# Altium PCB LED_Ring_80mm.pcbdoc (part 2 of 3)
Units mm, origin at the board's own origin, x right, y up, seen from the top; angles counter-clockwise.
Board outline 95 x 95 mm, 2 copper layers (Top Layer, Bottom Layer), stack 1.071 mm thick; 20 components, 18 nets, 2525 pads, 18 vias.
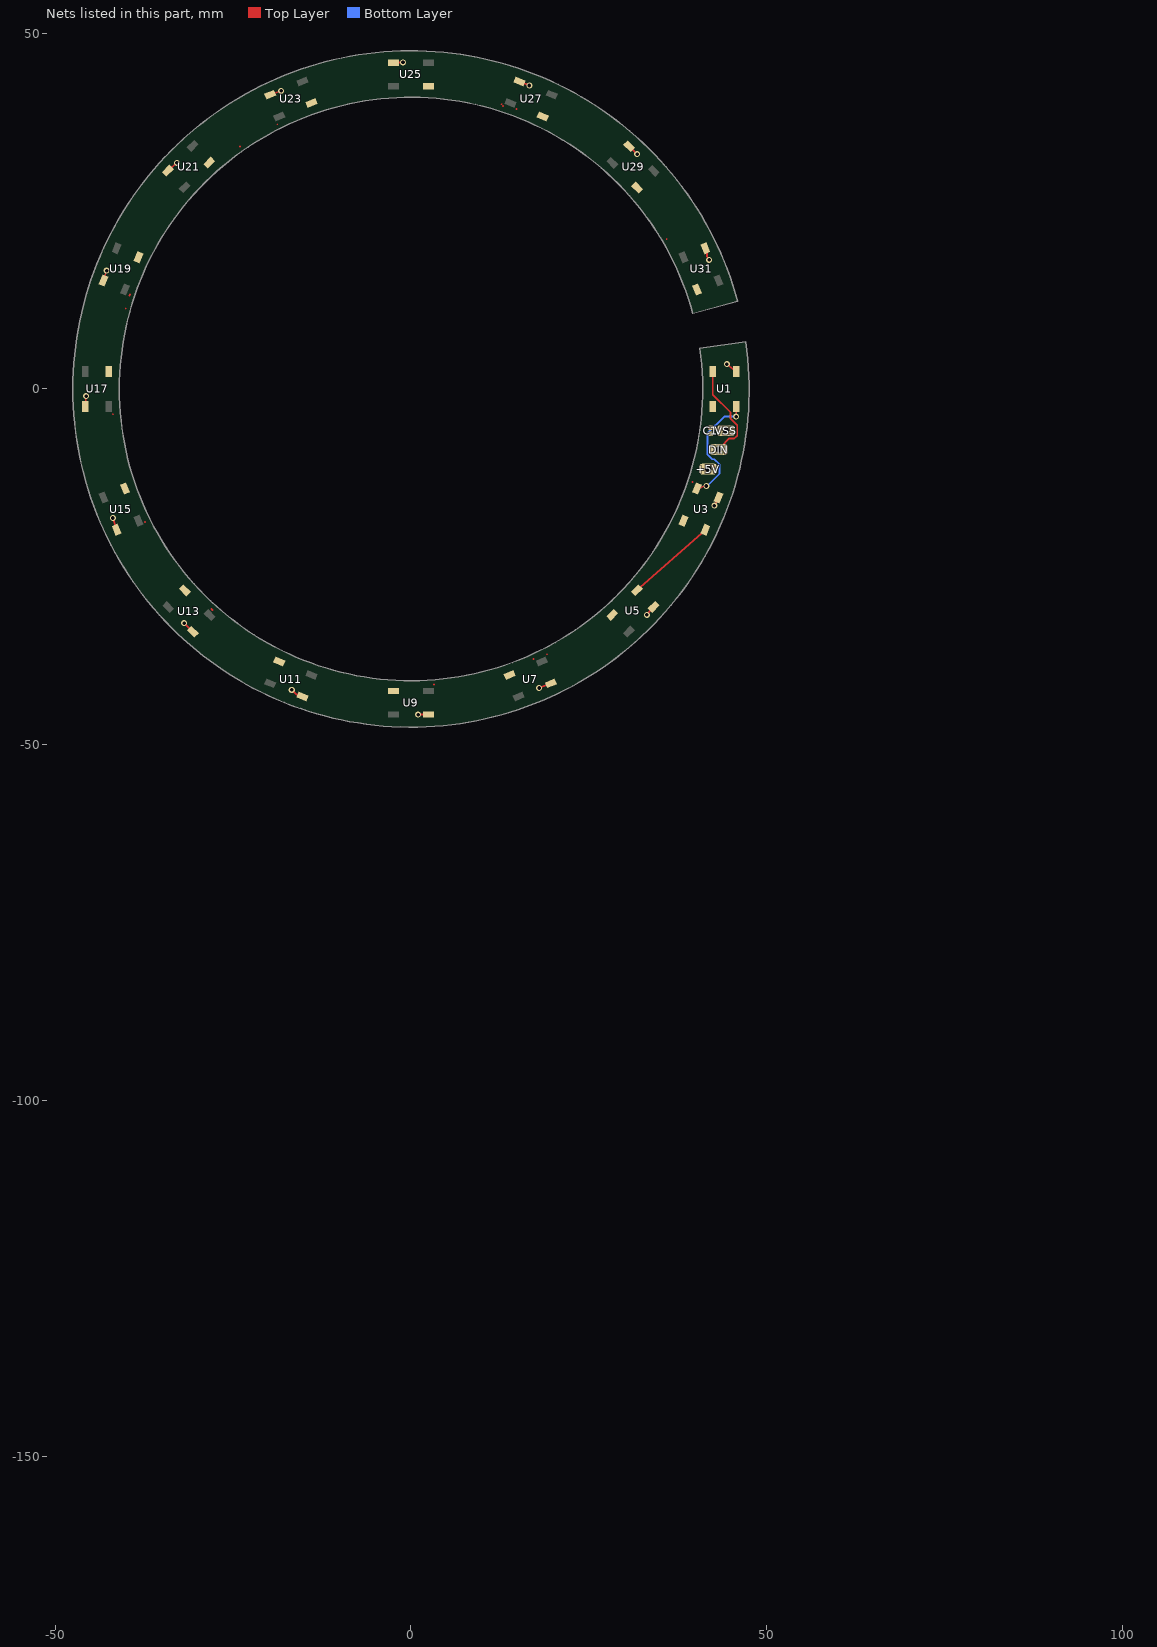
[diagram p2: the nets of this part, all layers, seen from the top]

## Free pads (board coordinates)
  round 0.042 on Mech7: 1(77.389,-166.432) 1(77.389,-166.432) 1(77.401,-166.262) 1(77.401,-166.262) 1(77.413,-166.444) 1(77.413,-166.444) 1(77.423,-166.216) 1(77.423,-166.216) 1(77.446,-166.08) 1(77.446,-166.08) 1(77.48,-166.421) 1(77.48,-166.421) 1(77.503,-165.943) 1(77.503,-165.943) 1(77.515,-165.864) 1(77.515,-165.864) 1(77.56,-165.773) 1(77.56,-165.773) 1(77.571,-166.33) 1(77.571,-166.33) 1(77.571,-165.716) 1(77.571,-165.716) 1(77.583,-166.295) 1(77.583,-166.295) 1(77.605,-166.284) 1(77.605,-166.284) 1(77.617,-166.25) 1(77.617,-166.25) 1(77.65,-166.216) 1(77.65,-166.216) 1(77.65,-165.557) 1(77.65,-165.557) 1(77.662,-166.182) 1(77.662,-166.182) 1(77.685,-165.432) 1(77.685,-165.432) 1(77.697,-166.148) 1(77.697,-166.148) 1(77.719,-165.387) 1(77.719,-165.387) 1(77.73,-165.33) 1(77.73,-165.33) 1(77.742,-166.046) 1(77.742,-166.046) 1(77.764,-166.035) 1(77.764,-166.035) 1(77.764,-165.273) 1(77.764,-165.273) 1(77.776,-166) 1(77.776,-166) 1(77.776,-165.216) 1(77.776,-165.216) 1(77.799,-165.989) 1(77.799,-165.989) 1(77.799,-161.524) 1(77.799,-161.524) 1(77.81,-165.955) 1(77.81,-165.955) 1(77.81,-161.251) 1(77.81,-161.251) 1(77.832,-161.853) 1(77.832,-161.853) 1(77.832,-161.217) 1(77.832,-161.217) 1(77.844,-165.921) 1(77.844,-165.921) 1(77.844,-165.103) 1(77.844,-165.103) 1(77.855,-165.886) 1(77.855,-165.886) 1(77.855,-165.046) 1(77.855,-165.046) 1(77.855,-161.899) 1(77.855,-161.899) 1(77.867,-162.001) 1(77.867,-162.001) 1(77.867,-161.206) 1(77.867,-161.206) 1(77.878,-161.228) 1(77.878,-161.228) 1(77.889,-165.853) 1(77.889,-165.853) 1(77.901,-162.103) 1(77.901,-162.103) 1(77.901,-161.228) 1(77.901,-161.228) 1(77.924,-164.921) 1(77.924,-164.921) 1(77.934,-165.75) 1(77.934,-165.75) 1(77.934,-164.864) 1(77.934,-164.864) 1(77.958,-162.421) 1(77.958,-162.421) 1(77.958,-161.308) 1(77.958,-161.308) 1(77.969,-165.716) 1(77.969,-165.716) 1(77.981,-165.682) 1(77.981,-165.682) 1(77.981,-161.365) 1(77.981,-161.365) 1(77.991,-161.365) 1(77.991,-161.365) 1(78.014,-165.648) 1(78.014,-165.648) 1(78.014,-162.581) 1(78.014,-162.581) 1(78.026,-165.614) 1(78.026,-165.614) 1(78.026,-161.445) 1(78.026,-161.445) 1(78.037,-161.445) 1(78.037,-161.445) 1(78.048,-164.66) 1(78.048,-164.66) 1(78.048,-161.501) 1(78.048,-161.501) 1(78.06,-165.58) 1(78.06,-165.58) 1(78.06,-164.603) 1(78.06,-164.603) 1(78.06,-161.501) 1(78.06,-161.501) 1(78.071,-165.545) 1(78.071,-165.545) 1(78.071,-162.842) 1(78.071,-162.842) 1(78.083,-161.58) 1(78.083,-161.58) 1(78.094,-161.58) 1(78.094,-161.58) 1(78.105,-165.512) 1(78.105,-165.512) 1(78.116,-165.478) 1(78.116,-165.478) 1(78.128,-161.694) 1(78.128,-161.694) 1(78.14,-161.694) 1(78.14,-161.694) 1(78.151,-161.751) 1(78.151,-161.751) 1(78.162,-161.751) 1(78.162,-161.751) 1(78.185,-165.387) 1(78.185,-165.387) 1(78.196,-165.353) 1(78.196,-165.353) 1(78.196,-164.342) 1(78.196,-164.342) 1(78.196,-161.853) 1(78.196,-161.853) 1(78.208,-161.853) 1(78.208,-161.853) 1(78.219,-163.251) 1(78.219,-163.251) 1(78.219,-161.91) 1(78.219,-161.91) 1(78.23,-163.33) 1(78.23,-163.33) 1(78.23,-161.91) 1(78.23,-161.91) 1(78.242,-161.967) 1(78.242,-161.967) 1(78.253,-165.273) 1(78.253,-165.273) 1(78.253,-164.262) 1(78.253,-164.262) 1(78.253,-161.967) 1(78.253,-161.967) 1(78.265,-163.398) 1(78.265,-163.398) 1(78.265,-162.023) 1(78.265,-162.023) 1(78.275,-165.216) 1(78.275,-165.216) 1(78.275,-164.205) 1(78.275,-164.205) 1(78.275,-163.478) 1(78.275,-163.478) 1(78.275,-162.023) 1(78.275,-162.023) 1(78.298,-165.205) 1(78.298,-165.205) 1(78.298,-162.115) 1(78.298,-162.115) 1(78.31,-165.171) 1(78.31,-165.171) 1(78.31,-162.115) 1(78.31,-162.115) 1(78.321,-162.172) 1(78.321,-162.172) 1(78.332,-162.172) 1(78.332,-162.172) 1(78.344,-165.137) 1(78.344,-165.137) 1(78.344,-163.649) 1(78.344,-163.649) 1(78.344,-162.228) 1(78.344,-162.228) 1(78.355,-165.103) 1(78.355,-165.103) 1(78.355,-164.058) 1(78.355,-164.058) 1(78.355,-163.705) 1(78.355,-163.705) 1(78.355,-162.228) 1(78.355,-162.228) 1(78.367,-162.285) 1(78.367,-162.285) 1(78.378,-162.285) 1(78.378,-162.285) 1(78.389,-162.342) 1(78.389,-162.342) 1(78.4,-165.057) 1(78.4,-165.057) 1(78.4,-163.796) 1(78.4,-163.796) 1(78.4,-162.342) 1(78.4,-162.342) 1(78.412,-165.024) 1(78.412,-165.024) 1(78.412,-163.978) 1(78.412,-163.978) 1(78.412,-163.853) 1(78.412,-163.853) 1(78.412,-162.399) 1(78.412,-162.399) 1(78.424,-162.399) 1(78.424,-162.399) 1(78.435,-163.921) 1(78.435,-163.921) 1(78.446,-164.989) 1(78.446,-164.989) 1(78.446,-163.91) 1(78.446,-163.91) 1(78.446,-162.478) 1(78.446,-162.478) 1(78.457,-164.955) 1(78.457,-164.955) 1(78.457,-162.478) 1(78.457,-162.478) 1(78.469,-162.535) 1(78.469,-162.535) 1(78.48,-162.535) 1(78.48,-162.535) 1(78.492,-164.921) 1(78.492,-164.921) 1(78.503,-162.615) 1(78.503,-162.615) 1(78.514,-164.864) 1(78.514,-164.864) 1(78.514,-162.615) 1(78.514,-162.615) 1(78.537,-164.853) 1(78.537,-164.853) 1(78.549,-164.818) 1(78.549,-164.818) 1(78.559,-162.705) 1(78.559,-162.705) 1(78.594,-164.773) 1(78.594,-164.773) 1(78.606,-164.739) 1(78.606,-164.739) 1(78.606,-162.865) 1(78.606,-162.865) 1(78.616,-162.865) 1(78.616,-162.865) 1(78.628,-164.728) 1(78.628,-164.728) 1(78.628,-162.922) 1(78.628,-162.922) 1(78.639,-164.693) 1(78.639,-164.693) 1(78.639,-162.922) 1(78.639,-162.922) 1(78.662,-164.683) 1(78.662,-164.683) 1(78.673,-164.648) 1(78.673,-164.648) 1(78.696,-164.637) 1(78.696,-164.637) 1(78.708,-164.603) 1(78.708,-164.603) 1(78.741,-164.58) 1(78.741,-164.58) 1(78.764,-163.171) 1(78.764,-163.171) 1(78.776,-163.228) 1(78.776,-163.228) 1(78.787,-163.228) 1(78.787,-163.228) 1(78.81,-163.296) 1(78.81,-163.296) 1(78.843,-164.773) 1(78.843,-164.773) 1(78.878,-163.228) 1(78.878,-163.228) 1(78.89,-163.194) 1(78.89,-163.194) 1(78.935,-163.114) 1(78.935,-163.114) 1(78.969,-163.081) 1(78.969,-163.081) 1(78.98,-163.046) 1(78.98,-163.046) 1(79.003,-165.08) 1(79.003,-165.08) 1(79.014,-165.114) 1(79.014,-165.114) 1(79.025,-163.012) 1(79.025,-163.012) 1(79.037,-162.978) 1(79.037,-162.978) 1(79.06,-162.967) 1(79.06,-162.967) 1(79.071,-165.194) 1(79.071,-165.194) 1(79.071,-162.932) 1(79.071,-162.932) 1(79.082,-165.228) 1(79.082,-165.228) 1(79.117,-165.261) 1(79.117,-165.261) 1(79.127,-165.296) 1(79.127,-165.296) 1(79.139,-162.865) 1(79.139,-162.865) 1(79.151,-162.83) 1(79.151,-162.83) 1(79.162,-165.33) 1(79.162,-165.33) 1(79.174,-165.364) 1(79.174,-165.364) 1(79.184,-164.012) 1(79.184,-164.012) 1(79.196,-165.375) 1(79.196,-165.375) 1(79.196,-164.012) 1(79.196,-164.012) 1(79.196,-162.751) 1(79.196,-162.751) 1(79.207,-165.41) 1(79.207,-165.41) 1(79.219,-164.068) 1(79.219,-164.068) 1(79.23,-164.068) 1(79.23,-164.068) 1(79.241,-163.955) 1(79.241,-163.955) 1(79.241,-162.717) 1(79.241,-162.717) 1(79.253,-163.921) 1(79.253,-163.921) 1(79.253,-162.683) 1(79.253,-162.683) 1(79.264,-165.489) 1(79.264,-165.489) 1(79.264,-164.148) 1(79.264,-164.148) 1(79.276,-165.523) 1(79.276,-165.523) 1(79.276,-164.148) 1(79.276,-164.148) 1(79.298,-164.205) 1(79.298,-164.205) 1(79.298,-163.887) 1(79.298,-163.887) 1(79.309,-165.557) 1(79.309,-165.557) 1(79.309,-164.205) 1(79.309,-164.205) 1(79.309,-163.853) 1(79.309,-163.853) 1(79.321,-165.592) 1(79.321,-165.592) 1(79.332,-164.262) 1(79.332,-164.262) 1(79.344,-164.262) 1(79.344,-164.262) 1(79.355,-165.625) 1(79.355,-165.625) 1(79.355,-163.819) 1(79.355,-163.819) 1(79.366,-165.659) 1(79.366,-165.659) 1(79.366,-164.319) 1(79.366,-164.319) 1(79.366,-163.784) 1(79.366,-163.784) 1(79.366,-162.581) 1(79.366,-162.581) 1(79.378,-164.319) 1(79.378,-164.319) 1(79.378,-162.546) 1(79.378,-162.546) 1(79.389,-165.671) 1(79.389,-165.671) 1(79.401,-165.705) 1(79.401,-165.705) 1(79.401,-164.376) 1(79.401,-164.376) 1(79.411,-164.376) 1(79.411,-164.376) 1(79.423,-165.716) 1(79.423,-165.716) 1(79.423,-164.409) 1(79.423,-164.409) 1(79.423,-163.739) 1(79.423,-163.739) 1(79.423,-162.512) 1(79.423,-162.512) 1(79.435,-165.75) 1(79.435,-165.75) 1(79.435,-164.409) 1(79.435,-164.409) 1(79.435,-163.705) 1(79.435,-163.705) 1(79.435,-162.478) 1(79.435,-162.478) 1(79.446,-164.444) 1(79.446,-164.444) 1(79.458,-165.762) 1(79.458,-165.762) 1(79.458,-164.444) 1(79.458,-164.444) 1(79.468,-165.796) 1(79.468,-165.796) 1(79.468,-164.478) 1(79.468,-164.478) 1(79.48,-164.478) 1(79.48,-164.478) 1(79.48,-162.444) 1(79.48,-162.444) 1(79.491,-164.512) 1(79.491,-164.512) 1(79.491,-162.41) 1(79.491,-162.41) 1(79.503,-165.819) 1(79.503,-165.819) 1(79.503,-164.512) 1(79.503,-164.512) 1(79.514,-165.853) 1(79.514,-165.853) 1(79.514,-164.546) 1(79.514,-164.546) 1(79.525,-164.546) 1(79.525,-164.546) 1(79.548,-162.364) 1(79.548,-162.364) 1(79.56,-165.886) 1(79.56,-165.886) 1(79.56,-162.331) 1(79.56,-162.331) 1(79.571,-165.921) 1(79.571,-165.921) 1(79.571,-164.626) 1(79.571,-164.626) 1(79.582,-164.626) 1(79.582,-164.626) 1(79.605,-164.671) 1(79.605,-164.671) 1(79.616,-165.955) 1(79.616,-165.955) 1(79.616,-164.671) 1(79.616,-164.671) 1(79.628,-165.989) 1(79.628,-165.989) 1(79.628,-164.705) 1(79.628,-164.705) 1(79.639,-164.705) 1(79.639,-164.705) 1(79.662,-164.75) 1(79.662,-164.75) 1(79.673,-166.023) 1(79.673,-166.023) 1(79.673,-164.75) 1(79.673,-164.75) 1(79.685,-166.057) 1(79.685,-166.057) 1(79.685,-164.785) 1(79.685,-164.785) 1(79.695,-164.785) 1(79.695,-164.785) 1(79.719,-164.83) 1(79.719,-164.83) 1(79.73,-166.091) 1(79.73,-166.091) 1(79.73,-164.83) 1(79.73,-164.83) 1(79.742,-166.125) 1(79.742,-166.125) 1(79.742,-164.864) 1(79.742,-164.864) 1(79.742,-163.41) 1(79.742,-163.41) 1(79.752,-164.864) 1(79.752,-164.864) 1(79.752,-163.376) 1(79.752,-163.376) 1(79.775,-164.91) 1(79.775,-164.91) 1(79.787,-164.91) 1(79.787,-164.91) 1(79.798,-164.944) 1(79.798,-164.944) 1(79.809,-164.944) 1(79.809,-164.944) 1(79.809,-163.319) 1(79.809,-163.319) 1(79.832,-164.989) 1(79.832,-164.989) 1(79.844,-164.989) 1(79.844,-164.989) 1(79.844,-163.308) 1(79.844,-163.308) 1(79.877,-165.024) 1(79.877,-165.024) 1(79.877,-163.262) 1(79.877,-163.262) 1(79.889,-165.057) 1(79.889,-165.057) 1(79.9,-165.057) 1(79.9,-165.057) 1(79.912,-163.251) 1(79.912,-163.251) 1(79.946,-165.103) 1(79.946,-165.103) 1(79.946,-161.944) 1(79.946,-161.944) 1(79.957,-165.137) 1(79.957,-165.137) 1(79.969,-165.137) 1(79.969,-165.137) 1(79.979,-161.933) 1(79.979,-161.933) 1(80.026,-163.126) 1(80.026,-163.126) 1(80.059,-163.114) 1(80.059,-163.114) 1(80.083,-165.251) 1(80.083,-165.251) 1(80.083,-161.819) 1(80.083,-161.819) 1(80.093,-165.284) 1(80.093,-165.284) 1(80.093,-163.069) 1(80.093,-163.069) 1(80.105,-165.284) 1(80.105,-165.284) 1(80.116,-161.808) 1(80.116,-161.808) 1(80.128,-163.057) 1(80.128,-163.057) 1(80.161,-166.546) 1(80.161,-166.546) 1(80.161,-161.762) 1(80.161,-161.762) 1(80.173,-163.001) 1(80.173,-163.001) 1(80.196,-166.557) 1(80.196,-166.557) 1(80.196,-161.751) 1(80.196,-161.751) 1(80.207,-162.989) 1(80.207,-162.989) 1(80.23,-166.603) 1(80.23,-166.603) 1(80.23,-161.706) 1(80.23,-161.706) 1(80.264,-166.614) 1(80.264,-166.614) 1(80.264,-161.694) 1(80.264,-161.694) 1(80.275,-162.922) 1(80.275,-162.922) 1(80.31,-166.671) 1(80.31,-166.671) 1(80.31,-162.91) 1(80.31,-162.91) 1(80.31,-161.637) 1(80.31,-161.637) 1(80.32,-162.887) 1(80.32,-162.887) 1(80.343,-166.682) 1(80.343,-166.682) 1(80.343,-161.626) 1(80.343,-161.626) 1(80.355,-162.876) 1(80.355,-162.876) 1(80.377,-166.728) 1(80.377,-166.728) 1(80.377,-161.58) 1(80.377,-161.58) 1(80.4,-165.592) 1(80.4,-165.592) 1(80.412,-166.738) 1(80.412,-166.738) 1(80.412,-161.569) 1(80.412,-161.569) 1(80.423,-165.592) 1(80.423,-165.592) 1(80.423,-162.808) 1(80.423,-162.808) 1(80.434,-166.773) 1(80.434,-166.773) 1(80.457,-162.797) 1(80.457,-162.797) 1(80.457,-161.524) 1(80.457,-161.524) 1(80.469,-166.785) 1(80.469,-166.785) 1(80.469,-165.648) 1(80.469,-165.648) 1(80.48,-166.807) 1(80.48,-166.807) 1(80.491,-165.648) 1(80.491,-165.648) 1(80.491,-161.512) 1(80.491,-161.512) 1(80.502,-162.751) 1(80.502,-162.751) 1(80.514,-166.818) 1(80.514,-166.818) 1(80.525,-166.841) 1(80.525,-166.841) 1(80.537,-162.74) 1(80.537,-162.74) 1(80.537,-161.467) 1(80.537,-161.467) 1(80.548,-165.716) 1(80.548,-165.716) 1(80.559,-166.852) 1(80.559,-166.852) 1(80.571,-165.716) 1(80.571,-165.716) 1(80.571,-161.455) 1(80.571,-161.455) 1(80.582,-162.694) 1(80.582,-162.694) 1(80.594,-166.887) 1(80.594,-166.887) 1(80.616,-165.773) 1(80.616,-165.773) 1(80.616,-162.683) 1(80.616,-162.683) 1(80.616,-161.41) 1(80.616,-161.41) 1(80.627,-166.898) 1(80.627,-166.898) 1(80.639,-165.773) 1(80.639,-165.773) 1(80.661,-166.932) 1(80.661,-166.932) 1(80.661,-165.807) 1(80.661,-165.807) 1(80.661,-162.638) 1(80.661,-162.638) 1(80.684,-165.807) 1(80.684,-165.807) 1(80.696,-165.829) 1(80.696,-165.829) 1(80.696,-162.626) 1(80.696,-162.626) 1(80.707,-162.603) 1(80.707,-162.603) 1(80.718,-166.955) 1(80.718,-166.955) 1(80.718,-165.829) 1(80.718,-165.829) 1(80.741,-165.864) 1(80.741,-165.864) 1(80.741,-161.353) 1(80.741,-161.353) 1(80.753,-166.989) 1(80.753,-166.989) 1(80.764,-165.864) 1(80.764,-165.864) 1(80.775,-165.886) 1(80.775,-165.886) 1(80.786,-167) 1(80.786,-167) 1(80.786,-162.569) 1(80.786,-162.569) 1(80.786,-161.308) 1(80.786,-161.308) 1(80.798,-165.886) 1(80.798,-165.886) 1(80.821,-167.034) 1(80.821,-167.034) 1(80.821,-165.921) 1(80.821,-165.921) 1(80.821,-162.535) 1(80.821,-162.535) 1(80.843,-165.921) 1(80.843,-165.921) 1(80.855,-167.045) 1(80.855,-167.045) 1(80.855,-165.943) 1(80.855,-165.943) 1(80.855,-162.524) 1(80.855,-162.524) 1(80.866,-162.501) 1(80.866,-162.501) 1(80.866,-161.274) 1(80.866,-161.274) 1(80.878,-165.943) 1(80.878,-165.943) 1(80.9,-165.978) 1(80.9,-165.978) 1(80.923,-165.978) 1(80.923,-165.978) 1(80.935,-167.102) 1(80.935,-167.102) 1(80.935,-166) 1(80.935,-166) 1(80.945,-162.456) 1(80.945,-162.456) 1(80.957,-166) 1(80.957,-166) 1(80.957,-161.217) 1(80.957,-161.217) 1(80.968,-167.114) 1(80.968,-167.114) 1(80.968,-166.023) 1(80.968,-166.023) 1(80.991,-166.023) 1(80.991,-166.023) 1(81.002,-166.046) 1(81.002,-166.046) 1(81.002,-162.433) 1(81.002,-162.433) 1(81.025,-166.046) 1(81.025,-166.046) 1(81.037,-166.068) 1(81.037,-166.068) 1(81.037,-162.399) 1(81.037,-162.399) 1(81.037,-161.171) 1(81.037,-161.171) 1(81.048,-167.171) 1(81.048,-167.171) 1(81.059,-166.068) 1(81.059,-166.068) 1(81.07,-166.091) 1(81.07,-166.091) 1(81.093,-166.091) 1(81.093,-166.091) 1(81.116,-162.354) 1(81.116,-162.354) 1(81.127,-166.125) 1(81.127,-166.125) 1(81.15,-166.125) 1(81.15,-166.125) 1(81.196,-162.307) 1(81.196,-162.307) 1(81.252,-162.297) 1(81.252,-162.297) 1(81.264,-167.284) 1(81.264,-167.284) 1(81.321,-167.296) 1(81.321,-167.296) 1(81.343,-167.318) 1(81.343,-167.318) 1(81.4,-167.33) 1(81.4,-167.33) 1(81.4,-160.979) 1(81.4,-160.979) 1(81.446,-167.363) 1(81.446,-167.363) 1(81.457,-162.183) 1(81.457,-162.183) 1(81.503,-167.375) 1(81.503,-167.375) 1(81.513,-162.172) 1(81.513,-162.172) 1(81.525,-160.944) 1(81.525,-160.944) 1(81.536,-166.33) 1(81.536,-166.33) 1(81.536,-162.149) 1(81.536,-162.149) 1(81.57,-166.33) 1(81.57,-166.33) 1(81.582,-167.42) 1(81.582,-167.42) 1(81.593,-160.899) 1(81.593,-160.899) 1(81.616,-166.364) 1(81.616,-166.364) 1(81.627,-162.126) 1(81.627,-162.126) 1(81.65,-166.364) 1(81.65,-166.364) 1(81.673,-166.387) 1(81.673,-166.387) 1(81.707,-166.387) 1(81.707,-166.387) 1(81.718,-162.08) 1(81.718,-162.08) 1(81.764,-166.421) 1(81.764,-166.421) 1(81.775,-167.488) 1(81.775,-167.488) 1(81.787,-160.842) 1(81.787,-160.842) 1(81.797,-166.421) 1(81.797,-166.421) 1(81.889,-166.466) 1(81.889,-166.466) 1(81.911,-162.023) 1(81.911,-162.023) 1(81.922,-166.466) 1(81.922,-166.466) 1(81.968,-167.557) 1(81.968,-167.557) 1(81.991,-166.501) 1(81.991,-166.501) 1(81.991,-160.763) 1(81.991,-160.763) 1(82.002,-161.978) 1(82.002,-161.978) 1(82.036,-166.501) 1(82.036,-166.501) 1(82.059,-166.523) 1(82.059,-166.523) 1(82.093,-166.523) 1(82.093,-166.523) 1(82.093,-160.751) 1(82.093,-160.751) 1(82.116,-161.956) 1(82.116,-161.956) 1(82.173,-166.546) 1(82.173,-166.546) 1(82.184,-161.921) 1(82.184,-161.921) 1(82.195,-160.706) 1(82.195,-160.706) 1(82.275,-166.579) 1(82.275,-166.579) 1(82.286,-167.637) 1(82.286,-167.637) 1(82.332,-166.579) 1(82.332,-166.579) 1(82.365,-166.603) 1(82.365,-166.603) 1(82.365,-161.876) 1(82.365,-161.876) 1(82.389,-167.647) 1(82.389,-167.647) 1(82.412,-160.672) 1(82.412,-160.672) 1(82.422,-166.603) 1(82.422,-166.603) 1(82.468,-166.625) 1(82.468,-166.625) 1(82.468,-161.865) 1(82.468,-161.865) 1(82.536,-166.625) 1(82.536,-166.625) 1(82.57,-161.831) 1(82.57,-161.831) 1(82.582,-166.648) 1(82.582,-166.648) 1(82.604,-167.704) 1(82.604,-167.704) 1(82.627,-160.615) 1(82.627,-160.615) 1(82.639,-166.648) 1(82.639,-166.648) 1(82.684,-166.671) 1(82.684,-166.671) 1(82.718,-161.819) 1(82.718,-161.819) 1(82.741,-166.671) 1(82.741,-166.671) 1(82.775,-161.796) 1(82.775,-161.796) 1(82.786,-166.693) 1(82.786,-166.693) 1(82.843,-166.693) 1(82.843,-166.693) 1(82.911,-160.581) 1(82.911,-160.581) 1(82.923,-161.786) 1(82.923,-161.786) 1(82.945,-166.716) 1(82.945,-166.716) 1(82.968,-160.558) 1(82.968,-160.558) 1(82.98,-161.762) 1(82.98,-161.762) 1(83.059,-166.716) 1(83.059,-166.716) 1(83.127,-161.739) 1(83.127,-161.739) 1(83.161,-166.738) 1(83.161,-166.738) 1(83.172,-167.784) 1(83.172,-167.784) 1(83.274,-166.738) 1(83.274,-166.738) 1(83.32,-160.524) 1(83.32,-160.524) 1(83.445,-161.717) 1(83.445,-161.717) 1(83.502,-166.773) 1(83.502,-166.773) 1(83.558,-160.513) 1(83.558,-160.513) 1(83.729,-166.773) 1(83.729,-166.773) 1(83.786,-167.818) 1(83.786,-167.818) 1(83.991,-161.706) 1(83.991,-161.706) 1(84.297,-160.524) 1(84.297,-160.524) 1(84.343,-161.729) 1(84.343,-161.729) 1(84.422,-160.524) 1(84.422,-160.524) 1(84.57,-161.762) 1(84.57,-161.762) 1(84.627,-166.785) 1(84.627,-166.785) 1(84.786,-161.774) 1(84.786,-161.774) 1(84.808,-160.569) 1(84.808,-160.569) 1(84.831,-167.807) 1(84.831,-167.807) 1(84.876,-161.796) 1(84.876,-161.796) 1(84.945,-160.569) 1(84.945,-160.569) 1(85.025,-161.808) 1(85.025,-161.808) 1(85.149,-161.842) 1(85.149,-161.842) 1(85.252,-166.738) 1(85.252,-166.738) 1(85.263,-160.615) 1(85.263,-160.615) 1(85.331,-161.865) 1(85.331,-161.865) 1(85.366,-166.716) 1(85.366,-166.716) 1(85.468,-160.66) 1(85.468,-160.66) 1(85.593,-161.933) 1(85.593,-161.933) 1(85.603,-166.705) 1(85.603,-166.705) 1(85.603,-160.66) 1(85.603,-160.66) 1(85.65,-167.739) 1(85.65,-167.739) 1(85.672,-161.944) 1(85.672,-161.944) 1(85.706,-161.967) 1(85.706,-161.967) 1(85.74,-160.706) 1(85.74,-160.706) 1(85.808,-160.706) 1(85.808,-160.706) 1(85.899,-162.001) 1(85.899,-162.001) 1(85.934,-162.023) 1(85.934,-162.023) 1(86.013,-160.763) 1(86.013,-160.763) 1(86.047,-162.046) 1(86.047,-162.046) 1(86.081,-160.763) 1(86.081,-160.763) 1(86.104,-162.08) 1(86.104,-162.08) 1(86.228,-162.103) 1(86.228,-162.103) 1(86.297,-167.659) 1(86.297,-167.659) 1(86.445,-167.625) 1(86.445,-167.625) 1(86.467,-162.194) 1(86.467,-162.194) 1(86.502,-166.579) 1(86.502,-166.579) 1(86.558,-166.557) 1(86.558,-166.557) 1(86.592,-167.614) 1(86.592,-167.614) 1(86.661,-162.251) 1(86.661,-162.251) 1(86.683,-166.546) 1(86.683,-166.546) 1(86.717,-162.285) 1(86.717,-162.285) 1(86.729,-160.922) 1(86.729,-160.922) 1(86.876,-167.557) 1(86.876,-167.557) 1(86.876,-162.331) 1(86.876,-162.331) 1(86.933,-161.001) 1(86.933,-161.001) 1(86.956,-162.376) 1(86.956,-162.376) 1(86.967,-166.489) 1(86.967,-166.489) 1(86.978,-161.001) 1(86.978,-161.001) 1(87.024,-167.545) 1(87.024,-167.545) 1(87.149,-166.477) 1(87.149,-166.477) 1(87.16,-167.511) 1(87.16,-167.511) 1(87.217,-162.456) 1(87.217,-162.456) 1(87.251,-166.444) 1(87.251,-166.444) 1(87.285,-167.5) 1(87.285,-167.5) 1(87.297,-162.501) 1(87.297,-162.501) 1(87.342,-167.477) 1(87.342,-167.477) 1(87.354,-162.512) 1(87.354,-162.512) 1(87.354,-161.126) 1(87.354,-161.126) 1(87.399,-166.432) 1(87.399,-166.432) 1(87.399,-161.126) 1(87.399,-161.126) 1(87.411,-162.546) 1(87.411,-162.546) 1(87.444,-161.161) 1(87.444,-161.161) 1(87.478,-161.161) 1(87.478,-161.161) 1(87.501,-161.183) 1(87.501,-161.183) 1(87.535,-166.398) 1(87.535,-166.398) 1(87.535,-161.183) 1(87.535,-161.183) 1(87.603,-162.603) 1(87.603,-162.603) 1(87.638,-161.228) 1(87.638,-161.228) 1(87.66,-162.638) 1(87.66,-162.638) 1(87.683,-166.387) 1(87.683,-166.387) 1(87.683,-161.228) 1(87.683,-161.228) 1(87.717,-162.648) 1(87.717,-162.648) 1(87.728,-161.263) 1(87.728,-161.263) 1(87.74,-162.671) 1(87.74,-162.671) 1(87.751,-167.409) 1(87.751,-167.409) 1(87.762,-161.263) 1(87.762,-161.263) 1(87.785,-161.285) 1(87.785,-161.285) 1(87.797,-162.683) 1(87.797,-162.683) 1(87.819,-161.285) 1(87.819,-161.285) 1(87.853,-167.375) 1(87.853,-167.375) 1(87.922,-161.331) 1(87.922,-161.331) 1(87.932,-166.341) 1(87.932,-166.341) 1(87.944,-162.762) 1(87.944,-162.762) 1(87.956,-167.363) 1(87.956,-167.363) 1(87.967,-161.331) 1(87.967,-161.331) 1(87.979,-166.319) 1(87.979,-166.319) 1(88.012,-161.365) 1(88.012,-161.365) 1(88.035,-162.785) 1(88.035,-162.785) 1(88.046,-161.365) 1(88.046,-161.365) 1(88.058,-167.33) 1(88.058,-167.33) 1(88.069,-161.388) 1(88.069,-161.388) 1(88.103,-161.388) 1(88.103,-161.388) 1(88.126,-166.307) 1(88.126,-166.307) 1(88.126,-162.842) 1(88.126,-162.842) 1(88.126,-161.41) 1(88.126,-161.41) 1(88.16,-167.318) 1(88.16,-167.318) 1(88.16,-161.41) 1(88.16,-161.41) 1(88.183,-162.853) 1(88.183,-162.853) 1(88.183,-161.433) 1(88.183,-161.433) 1(88.216,-161.433) 1(88.216,-161.433) 1(88.263,-167.284) 1(88.263,-167.284) 1(88.285,-166.262) 1(88.285,-166.262) 1(88.296,-162.922) 1(88.296,-162.922) 1(88.296,-161.478) 1(88.296,-161.478) 1(88.33,-161.478) 1(88.33,-161.478) 1(88.353,-162.932) 1(88.353,-162.932) 1(88.353,-161.501) 1(88.353,-161.501) 1(88.365,-167.273) 1(88.365,-167.273) 1(88.387,-161.501) 1(88.387,-161.501) 1(88.41,-162.967) 1(88.41,-162.967) 1(88.433,-166.25) 1(88.433,-166.25) 1(88.467,-167.239) 1(88.467,-167.239) 1(88.467,-162.978) 1(88.467,-162.978) 1(88.501,-161.569) 1(88.501,-161.569) 1(88.535,-161.569) 1(88.535,-161.569) 1(88.557,-163.035) 1(88.557,-163.035) 1(88.557,-161.592) 1(88.557,-161.592) 1(88.569,-167.227) 1(88.569,-167.227) 1(88.592,-166.205) 1(88.592,-166.205) 1(88.592,-161.592) 1(88.592,-161.592) 1(88.614,-163.046) 1(88.614,-163.046) 1(88.614,-161.615) 1(88.614,-161.615) 1(88.649,-161.615) 1(88.649,-161.615) 1(88.728,-167.182) 1(88.728,-167.182) 1(88.751,-166.182) 1(88.751,-166.182) 1(88.876,-163.183) 1(88.876,-163.183) 1(88.888,-167.159) 1(88.888,-167.159) 1(88.898,-166.137) 1(88.898,-166.137) 1(88.933,-161.762) 1(88.933,-161.762) 1(88.967,-161.762) 1(88.967,-161.762) 1(89.046,-163.273) 1(89.046,-163.273) 1(89.103,-163.285) 1(89.103,-163.285) 1(89.115,-166.113) 1(89.115,-166.113) 1(89.205,-167.069) 1(89.205,-167.069) 1(89.217,-161.899) 1(89.217,-161.899) 1(89.251,-161.899) 1(89.251,-161.899) 1(89.296,-166.068) 1(89.296,-166.068) 1(89.364,-161.967) 1(89.364,-161.967) 1(89.376,-166.035) 1(89.376,-166.035) 1(89.399,-161.967) 1(89.399,-161.967) 1(89.409,-161.99) 1(89.409,-161.99) 1(89.433,-161.99) 1(89.433,-161.99) 1(89.444,-163.467) 1(89.444,-163.467) 1(89.466,-162.023) 1(89.466,-162.023) 1(89.489,-162.023) 1(89.489,-162.023) 1(89.569,-162.08) 1(89.569,-162.08) 1(89.591,-162.08) 1(89.591,-162.08) 1(89.693,-165.978) 1(89.693,-165.978) 1(89.796,-162.194) 1(89.796,-162.194) 1(89.83,-162.194) 1(89.83,-162.194) 1(89.842,-162.217) 1(89.842,-162.217) 1(89.864,-162.217) 1(89.864,-162.217) 1(89.899,-162.251) 1(89.899,-162.251) 1(89.91,-163.694) 1(89.91,-163.694) 1(89.921,-162.251) 1(89.921,-162.251) 1(89.944,-165.921) 1(89.944,-165.921) 1(89.944,-163.728) 1(89.944,-163.728) 1(89.978,-163.739) 1(89.978,-163.739) 1(90.001,-162.307) 1(90.001,-162.307) 1(90.024,-165.886) 1(90.024,-165.886) 1(90.024,-162.307) 1(90.024,-162.307) 1(90.057,-163.796) 1(90.057,-163.796) 1(90.126,-162.364) 1(90.126,-162.364) 1(90.137,-163.841) 1(90.137,-163.841) 1(90.159,-162.399) 1(90.159,-162.399) 1(90.183,-162.399) 1(90.183,-162.399) 1(90.216,-162.433) 1(90.216,-162.433) 1(90.239,-166.807) 1(90.239,-166.807) 1(90.239,-162.433) 1(90.239,-162.433) 1(90.273,-162.467) 1(90.273,-162.467) 1(90.296,-162.467) 1(90.296,-162.467) 1(90.318,-166.795) 1(90.318,-166.795) 1(90.33,-162.501) 1(90.33,-162.501) 1(90.353,-165.829) 1(90.353,-165.829) 1(90.353,-162.501) 1(90.353,-162.501) 1(90.375,-163.966) 1(90.375,-163.966) 1(90.398,-166.761) 1(90.398,-166.761) 1(90.444,-162.558) 1(90.444,-162.558) 1(90.455,-164.012) 1(90.455,-164.012) 1(90.478,-166.75) 1(90.478,-166.75) 1(90.523,-165.773) 1(90.523,-165.773) 1(90.523,-162.615) 1(90.523,-162.615) 1(90.535,-164.058) 1(90.535,-164.058) 1(90.546,-162.615) 1(90.546,-162.615) 1(90.557,-166.716) 1(90.557,-166.716) 1(90.557,-162.638) 1(90.557,-162.638) 1(90.58,-162.638) 1(90.58,-162.638) 1(90.614,-164.103) 1(90.614,-164.103) 1(90.614,-162.671) 1(90.614,-162.671) 1(90.637,-166.705) 1(90.637,-166.705) 1(90.637,-162.671) 1(90.637,-162.671) 1(90.694,-165.739) 1(90.694,-165.739) 1(90.694,-164.148) 1(90.694,-164.148) 1(90.716,-166.671) 1(90.716,-166.671) 1(90.728,-162.728) 1(90.728,-162.728) 1(90.773,-164.194) 1(90.773,-164.194) 1(90.796,-166.659) 1(90.796,-166.659) 1(90.807,-162.785) 1(90.807,-162.785) 1(90.83,-162.785) 1(90.83,-162.785) 1(90.841,-162.808) 1(90.841,-162.808) 1(90.853,-164.239) 1(90.853,-164.239) 1(90.864,-162.808) 1(90.864,-162.808) 1(90.876,-166.625) 1(90.876,-166.625) 1(90.876,-162.83) 1(90.876,-162.83) 1(90.898,-162.83) 1(90.898,-162.83) 1(90.91,-164.262) 1(90.91,-164.262) 1(90.91,-162.853) 1(90.91,-162.853) 1(90.933,-165.682) 1(90.933,-165.682) 1(90.933,-162.853) 1(90.933,-162.853) 1(90.943,-162.876) 1(90.943,-162.876) 1(90.955,-166.614) 1(90.955,-166.614) 1(90.966,-162.876) 1(90.966,-162.876) 1(90.978,-162.899) 1(90.978,-162.899) 1(90.989,-164.319) 1(90.989,-164.319) 1(91,-162.899) 1(91,-162.899) 1(91.012,-165.648) 1(91.012,-165.648) 1(91.012,-162.922) 1(91.012,-162.922) 1(91.023,-164.33) 1(91.023,-164.33) 1(91.035,-166.579) 1(91.035,-166.579) 1(91.035,-162.922) 1(91.035,-162.922) 1(91.068,-162.955) 1(91.068,-162.955) 1(91.092,-162.955) 1(91.092,-162.955) 1(91.114,-166.568) 1(91.114,-166.568) 1(91.114,-165.637) 1(91.114,-165.637) 1(91.114,-164.399) 1(91.114,-164.399) 1(91.137,-163.001) 1(91.137,-163.001) 1(91.16,-163.001) 1(91.16,-163.001) 1(91.182,-163.035) 1(91.182,-163.035) 1(91.194,-165.602) 1(91.194,-165.602) 1(91.194,-164.444) 1(91.194,-164.444) 1(91.205,-163.035) 1(91.205,-163.035) 1(91.227,-163.069) 1(91.227,-163.069) 1(91.239,-166.523) 1(91.239,-166.523) 1(91.25,-164.466) 1(91.25,-164.466) 1(91.25,-163.069) 1(91.25,-163.069) 1(91.262,-163.092) 1(91.262,-163.092) 1(91.284,-163.092) 1(91.284,-163.092) 1(91.296,-163.114) 1(91.296,-163.114) 1(91.319,-163.114) 1(91.319,-163.114) 1(91.33,-164.523) 1(91.33,-164.523) 1(91.352,-165.58) 1(91.352,-165.58) 1(91.352,-163.149) 1(91.352,-163.149) 1(91.364,-166.501) 1(91.364,-166.501) 1(91.376,-163.149) 1(91.376,-163.149) 1(91.409,-164.558) 1(91.409,-164.558) 1(91.421,-163.194) 1(91.421,-163.194) 1(91.444,-166.466) 1(91.444,-166.466) 1(91.444,-164.591) 1(91.444,-164.591) 1(91.444,-163.194) 1(91.444,-163.194) 1(91.466,-163.228) 1(91.466,-163.228) 1(91.478,-165.535) 1(91.478,-165.535) 1(91.478,-164.603) 1(91.478,-164.603) 1(91.489,-163.228) 1(91.489,-163.228) 1(91.511,-164.637) 1(91.511,-164.637) 1(91.511,-163.262) 1(91.511,-163.262) 1(91.523,-166.454) 1(91.523,-166.454) 1(91.534,-163.262) 1(91.534,-163.262) 1(91.546,-164.648) 1(91.546,-164.648) 1(91.546,-163.285) 1(91.546,-163.285) 1(91.568,-163.285) 1(91.568,-163.285) 1(91.58,-164.683) 1(91.58,-164.683) 1(91.58,-163.308) 1(91.58,-163.308) 1(91.603,-166.421) 1(91.603,-166.421) 1(91.603,-165.512) 1(91.603,-165.512) 1(91.603,-163.308) 1(91.603,-163.308) 1(91.614,-164.693) 1(91.614,-164.693) 1(91.636,-163.341) 1(91.636,-163.341) 1(91.648,-164.728) 1(91.648,-164.728) 1(91.66,-163.341) 1(91.66,-163.341) 1(91.682,-166.409) 1(91.682,-166.409) 1(91.682,-165.478) 1(91.682,-165.478) 1(91.682,-164.739) 1(91.682,-164.739) 1(91.705,-163.387) 1(91.705,-163.387) 1(91.728,-163.387) 1(91.728,-163.387) 1(91.75,-163.421) 1(91.75,-163.421) 1(91.762,-166.375) 1(91.762,-166.375) 1(91.773,-164.807) 1(91.773,-164.807) 1(91.773,-163.421) 1(91.773,-163.421) 1(91.795,-163.455) 1(91.795,-163.455) 1(91.807,-164.818) 1(91.807,-164.818) 1(91.818,-163.455) 1(91.818,-163.455) 1(91.83,-163.478) 1(91.83,-163.478) 1(91.842,-166.364) 1(91.842,-166.364) 1(91.852,-165.443) 1(91.852,-165.443) 1(91.852,-163.478) 1(91.852,-163.478) 1(91.864,-163.5) 1(91.864,-163.5) 1(91.887,-164.875) 1(91.887,-164.875) 1(91.887,-163.5) 1(91.887,-163.5) 1(91.898,-163.523) 1(91.898,-163.523) 1(91.92,-166.33) 1(91.92,-166.33) 1(91.92,-164.887) 1(91.92,-164.887) 1(91.92,-163.523) 1(91.92,-163.523) 1(91.932,-163.547) 1(91.932,-163.547) 1(91.955,-163.547) 1(91.955,-163.547) 1(91.977,-163.58) 1(91.977,-163.58) 1(92,-166.319) 1(92,-166.319) 1(92,-164.944) 1(92,-164.944) 1(92,-163.58) 1(92,-163.58) 1(92.023,-165.387) 1(92.023,-165.387) 1(92.023,-163.614) 1(92.023,-163.614) 1(92.034,-164.955) 1(92.034,-164.955) 1(92.046,-163.614) 1(92.046,-163.614) 1(92.069,-164.989) 1(92.069,-164.989) 1(92.069,-163.649) 1(92.069,-163.649) 1(92.079,-166.284) 1(92.079,-166.284) 1(92.091,-163.649) 1(92.091,-163.649) 1(92.102,-165) 1(92.102,-165) 1(92.114,-163.682) 1(92.114,-163.682) 1(92.136,-165.034) 1(92.136,-165.034) 1(92.136,-163.682) 1(92.136,-163.682) 1(92.148,-165.364) 1(92.148,-165.364) 1(92.148,-163.705) 1(92.148,-163.705) 1(92.159,-166.273) 1(92.159,-166.273) 1(92.171,-165.046) 1(92.171,-165.046) 1(92.171,-163.705) 1(92.171,-163.705) 1(92.182,-163.728) 1(92.182,-163.728) 1(92.205,-165.08) 1(92.205,-165.08) 1(92.205,-163.728) 1(92.205,-163.728) 1(92.216,-163.751) 1(92.216,-163.751) 1(92.228,-166.239) 1(92.228,-166.239) 1(92.239,-165.091) 1(92.239,-165.091) 1(92.239,-163.751) 1(92.239,-163.751) 1(92.261,-163.784) 1(92.261,-163.784) 1(92.273,-165.318) 1(92.273,-165.318) 1(92.273,-165.126) 1(92.273,-165.126) 1(92.284,-163.784) 1(92.284,-163.784) 1(92.307,-166.227) 1(92.307,-166.227) 1(92.307,-165.137) 1(92.307,-165.137) 1(92.307,-163.819) 1(92.307,-163.819) 1(92.33,-163.819) 1(92.33,-163.819) 1(92.341,-165.171) 1(92.341,-165.171) 1(92.353,-165.308) 1(92.353,-165.308) 1(92.353,-163.853) 1(92.353,-163.853) 1(92.375,-163.853) 1(92.375,-163.853) 1(92.398,-163.887) 1(92.398,-163.887) 1(92.41,-166.182) 1(92.41,-166.182) 1(92.42,-163.887) 1(92.42,-163.887) 1(92.432,-165.228) 1(92.432,-165.228) 1(92.443,-163.921) 1(92.443,-163.921) 1(92.466,-165.239) 1(92.466,-165.239) 1(92.466,-163.921) 1(92.466,-163.921) 1(92.477,-165.273) 1(92.477,-165.273) 1(92.489,-166.17) 1(92.489,-166.17) 1(92.489,-163.955) 1(92.489,-163.955) 1(92.512,-163.955) 1(92.512,-163.955) 1(92.534,-163.989) 1(92.534,-163.989) 1(92.557,-163.989) 1(92.557,-163.989) 1(92.58,-164.023) 1(92.58,-164.023) 1(92.602,-164.023) 1(92.602,-164.023) 1(92.625,-164.058) 1(92.625,-164.058) 1(92.647,-164.058) 1(92.647,-164.058) 1(92.694,-164.115) 1(92.694,-164.115) 1(92.716,-164.115) 1(92.716,-164.115) 1(92.761,-164.171) 1(92.761,-164.171) 1(92.784,-164.171) 1(92.784,-164.171) 1(92.807,-166.057) 1(92.807,-166.057) 1(92.807,-164.205) 1(92.807,-164.205) 1(92.829,-164.205) 1(92.829,-164.205) 1(92.852,-164.239) 1(92.852,-164.239) 1(92.875,-164.239) 1(92.875,-164.239) 1(92.886,-166.046) 1(92.886,-166.046) 1(92.898,-164.273) 1(92.898,-164.273) 1(92.921,-164.273) 1(92.921,-164.273) 1(92.943,-164.307) 1(92.943,-164.307) 1(92.966,-166.011) 1(92.966,-166.011) 1(92.966,-164.307) 1(92.966,-164.307) 1(92.988,-164.342) 1(92.988,-164.342) 1(93.011,-164.342) 1(93.011,-164.342) 1(93.034,-164.376) 1(93.034,-164.376) 1(93.045,-166) 1(93.045,-166) 1(93.057,-164.376) 1(93.057,-164.376) 1(93.102,-164.432) 1(93.102,-164.432) 1(93.125,-164.432) 1(93.125,-164.432) 1(93.159,-164.478) 1(93.159,-164.478) 1(93.182,-164.478) 1(93.182,-164.478) 1(93.227,-164.534) 1(93.227,-164.534) 1(93.25,-164.534) 1(93.25,-164.534) 1(93.295,-164.591) 1(93.295,-164.591) 1(93.318,-164.591) 1(93.318,-164.591) 1(93.341,-164.626) 1(93.341,-164.626) 1(93.364,-164.626) 1(93.364,-164.626) 1(93.386,-165.876) 1(93.386,-165.876) 1(93.386,-164.66) 1(93.386,-164.66) 1(93.409,-164.66) 1(93.409,-164.66) 1(93.421,-165.886) 1(93.421,-165.886) 1(93.432,-164.693) 1(93.432,-164.693) 1(93.454,-165.898) 1(93.454,-165.898) 1(93.454,-164.693) 1(93.454,-164.693) 1(93.5,-165.943) 1(93.5,-165.943) 1(93.534,-165.955) 1(93.534,-165.955) 1(93.546,-164.796) 1(93.546,-164.796) 1(93.568,-165.989) 1(93.568,-165.989) 1(93.568,-164.796) 1(93.568,-164.796) 1(93.579,-164.818) 1(93.579,-164.818) 1(93.603,-166) 1(93.603,-166) 1(93.603,-164.818) 1(93.603,-164.818) 1(93.636,-166.035) 1(93.636,-166.035) 1(93.648,-164.875) 1(93.648,-164.875) 1(93.67,-166.046) 1(93.67,-166.046) 1(93.67,-164.875) 1(93.67,-164.875) 1(93.693,-164.91) 1(93.693,-164.91) 1(93.705,-166.08) 1(93.705,-166.08) 1(93.716,-164.91) 1(93.716,-164.91) 1(93.727,-164.932) 1(93.727,-164.932) 1(93.738,-166.091) 1(93.738,-166.091) 1(93.773,-166.125) 1(93.773,-166.125) 1(93.807,-166.137) 1(93.807,-166.137) 1(93.852,-166.182) 1(93.852,-166.182) 1(93.887,-166.193) 1(93.887,-166.193) 1(93.909,-164.887) 1(93.909,-164.887) 1(93.92,-166.227) 1(93.92,-166.227) 1(93.954,-166.239) 1(93.954,-166.239) 1(93.989,-164.853) 1(93.989,-164.853) 1(94,-166.284) 1(94,-166.284) 1(94.034,-166.295) 1(94.034,-166.295) 1(94.068,-166.33) 1(94.068,-166.33) 1(94.068,-164.842) 1(94.068,-164.842) 1(94.102,-166.341) 1(94.102,-166.341) 1(94.114,-166.364) 1(94.114,-166.364) 1(94.148,-166.375) 1(94.148,-166.375) 1(94.148,-164.807) 1(94.148,-164.807) 1(94.181,-166.409) 1(94.181,-166.409) 1(94.216,-166.421) 1(94.216,-166.421) 1(94.227,-164.796) 1(94.227,-164.796) 1(94.261,-166.466) 1(94.261,-166.466) 1(94.306,-164.762) 1(94.306,-164.762) 1(94.352,-166.523) 1(94.352,-166.523) 1(94.386,-166.534) 1(94.386,-166.534) 1(94.386,-164.75) 1(94.386,-164.75) 1(94.398,-166.557) 1(94.398,-166.557) 1(94.432,-166.568) 1(94.432,-166.568) 1(94.443,-166.591) 1(94.443,-166.591) 1(94.443,-165.535) 1(94.443,-165.535) 1(94.455,-165.557) 1(94.455,-165.557) 1(94.465,-164.716) 1(94.465,-164.716) 1(94.477,-166.603) 1(94.477,-166.603) 1(94.477,-165.557) 1(94.477,-165.557) 1(94.488,-166.625) 1(94.488,-166.625) 1(94.522,-166.636) 1(94.522,-166.636) 1(94.534,-166.659) 1(94.534,-166.659) 1(94.545,-164.705) 1(94.545,-164.705) 1(94.568,-166.671) 1(94.568,-166.671) 1(94.579,-166.693) 1(94.579,-166.693) 1(94.579,-165.671) 1(94.579,-165.671) 1(94.602,-165.671) 1(94.602,-165.671) 1(94.614,-166.705) 1(94.614,-166.705) 1(94.625,-166.728) 1(94.625,-166.728) 1(94.647,-165.727) 1(94.647,-165.727) 1(94.659,-166.738) 1(94.659,-166.738) 1(94.659,-164.66) 1(94.659,-164.66) 1(94.67,-165.727) 1(94.67,-165.727) 1(94.704,-166.785) 1(94.704,-166.785) 1(94.739,-166.795) 1(94.739,-166.795) 1(94.739,-165.807) 1(94.739,-165.807) 1(94.739,-164.648) 1(94.739,-164.648) 1(94.761,-165.807) 1(94.761,-165.807) 1(94.784,-166.841) 1(94.784,-166.841) 1(94.818,-166.852) 1(94.818,-166.852) 1(94.818,-164.614) 1(94.818,-164.614) 1(94.829,-166.875) 1(94.829,-166.875) 1(94.841,-165.898) 1(94.841,-165.898) 1(94.863,-166.887) 1(94.863,-166.887) 1(94.863,-165.898) 1(94.863,-165.898) 1(94.898,-166.92) 1(94.898,-166.92) 1(94.898,-165.375) 1(94.898,-165.375) 1(94.898,-164.603) 1(94.898,-164.603) 1(94.931,-166.932) 1(94.931,-166.932) 1(94.931,-165.978) 1(94.931,-165.978) 1(94.931,-164.58) 1(94.931,-164.58) 1(94.954,-165.978) 1(94.954,-165.978) 1(94.977,-166.977) 1(94.977,-166.977) 1(95.011,-166.989) 1(95.011,-166.989) 1(95.056,-167.034) 1(95.056,-167.034) 1(95.056,-164.558) 1(95.056,-164.558) 1(95.068,-166.103) 1(95.068,-166.103) 1(95.09,-167.045) 1(95.09,-167.045) 1(95.09,-166.103) 1(95.09,-166.103) 1(95.102,-167.069) 1(95.102,-167.069) 1(95.125,-166.148) 1(95.125,-166.148) 1(95.136,-167.079) 1(95.136,-167.079) 1(95.136,-164.523) 1(95.136,-164.523) 1(95.147,-166.148) 1(95.147,-166.148) 1(95.17,-167.114) 1(95.17,-167.114) 1(95.193,-165.273) 1(95.193,-165.273) 1(95.204,-167.125) 1(95.204,-167.125) 1(95.215,-167.148) 1(95.215,-167.148) 1(95.215,-166.227) 1(95.215,-166.227) 1(95.215,-164.512) 1(95.215,-164.512) 1(95.238,-166.227) 1(95.238,-166.227) 1(95.25,-167.159) 1(95.25,-167.159) 1(95.25,-166.262) 1(95.25,-166.262) 1(95.261,-166.262) 1(95.261,-166.262) 1(95.284,-167.193) 1(95.284,-167.193) 1(95.295,-164.478) 1(95.295,-164.478) 1(95.317,-167.204) 1(95.317,-167.204) 1(95.317,-166.33) 1(95.317,-166.33) 1(95.34,-166.33) 1(95.34,-166.33) 1(95.352,-165.228) 1(95.352,-165.228) 1(95.363,-167.25) 1(95.363,-167.25) 1(95.374,-164.466) 1(95.374,-164.466) 1(95.397,-167.261) 1(95.397,-167.261) 1(95.431,-167.296) 1(95.431,-167.296) 1(95.454,-164.432) 1(95.454,-164.432) 1(95.466,-167.306) 1(95.466,-167.306) 1(95.477,-167.33) 1(95.477,-167.33) 1(95.477,-165.171) 1(95.477,-165.171) 1(95.511,-167.341) 1(95.511,-167.341) 1(95.511,-166.511) 1(95.511,-166.511) 1(95.534,-166.511) 1(95.534,-166.511) 1(95.534,-164.421) 1(95.534,-164.421) 1(95.556,-167.386) 1(95.556,-167.386) 1(95.591,-167.398) 1(95.591,-167.398) 1(95.601,-167.42) 1(95.601,-167.42) 1(95.613,-164.387) 1(95.613,-164.387) 1(95.624,-166.614) 1(95.624,-166.614) 1(95.636,-167.432) 1(95.636,-167.432) 1(95.636,-165.126) 1(95.636,-165.126) 1(95.648,-166.614) 1(95.648,-166.614) 1(95.681,-167.477) 1(95.681,-167.477) 1(95.693,-164.376) 1(95.693,-164.376) 1(95.715,-167.488) 1(95.715,-167.488) 1(95.727,-164.352) 1(95.727,-164.352) 1(95.738,-167.523) 1(95.738,-167.523) 1(95.761,-166.738) 1(95.761,-166.738) 1(95.761,-165.069) 1(95.761,-165.069) 1(95.772,-167.534) 1(95.772,-167.534) 1(95.783,-167.557) 1(95.783,-167.557) 1(95.783,-166.738) 1(95.783,-166.738) 1(95.807,-164.342) 1(95.807,-164.342) 1(95.818,-167.568) 1(95.818,-167.568) 1(95.829,-167.59) 1(95.829,-167.59) 1(95.863,-167.602) 1(95.863,-167.602) 1(95.875,-167.625) 1(95.875,-167.625) 1(95.885,-166.852) 1(95.885,-166.852) 1(95.908,-167.637) 1(95.908,-167.637) 1(95.908,-166.852) 1(95.908,-166.852) 1(95.92,-167.659) 1(95.92,-167.659) 1(95.92,-165.024) 1(95.92,-165.024) 1(95.92,-164.296) 1(95.92,-164.296) 1(95.954,-167.67) 1(95.954,-167.67) 1(95.999,-167.716) 1(95.999,-167.716) 1(95.999,-164.285) 1(95.999,-164.285) 1(96.034,-167.727) 1(96.034,-167.727) 1(96.045,-164.967) 1(96.045,-164.967) 1(96.056,-167.012) 1(96.056,-167.012) 1(96.079,-167.772) 1(96.079,-167.772) 1(96.079,-167.012) 1(96.079,-167.012) 1(96.113,-167.784) 1(96.113,-167.784) 1(96.113,-164.239) 1(96.113,-164.239) 1(96.159,-167.829) 1(96.159,-167.829) 1(96.181,-167.125) 1(96.181,-167.125) 1(96.193,-167.841) 1(96.193,-167.841) 1(96.193,-164.228) 1(96.193,-164.228) 1(96.204,-167.864) 1(96.204,-167.864) 1(96.204,-167.125) 1(96.204,-167.125) 1(96.238,-167.875) 1(96.238,-167.875) 1(96.249,-167.898) 1(96.249,-167.898) 1(96.272,-164.194) 1(96.272,-164.194) 1(96.283,-167.909) 1(96.283,-167.909) 1(96.295,-167.931) 1(96.295,-167.931) 1(96.329,-167.943) 1(96.329,-167.943) 1(96.34,-167.966) 1(96.34,-167.966) 1(96.351,-164.182) 1(96.351,-164.182) 1(96.375,-167.977) 1(96.375,-167.977) 1(96.386,-168) 1(96.386,-168) 1(96.386,-164.16) 1(96.386,-164.16) 1(96.408,-164.853) 1(96.408,-164.853) 1(96.42,-168.011) 1(96.42,-168.011) 1(96.431,-168.034) 1(96.431,-168.034) 1(96.465,-168.045) 1(96.465,-168.045) 1(96.465,-167.398) 1(96.465,-167.398) 1(96.465,-164.818) 1(96.465,-164.818) 1(96.465,-164.148) 1(96.465,-164.148) 1(96.477,-168.068) 1(96.477,-168.068) 1(96.488,-167.398) 1(96.488,-167.398) 1(96.51,-168.08) 1(96.51,-168.08) 1(96.522,-168.102) 1(96.522,-168.102) 1(96.522,-164.807) 1(96.522,-164.807) 1(96.545,-164.115) 1(96.545,-164.115) 1(96.556,-168.113) 1(96.556,-168.113) 1(96.579,-164.773) 1(96.579,-164.773) 1(96.602,-168.159) 1(96.602,-168.159) 1(96.602,-167.523) 1(96.602,-167.523) 1(96.624,-167.523) 1(96.624,-167.523) 1(96.624,-164.103) 1(96.624,-164.103) 1(96.636,-168.17) 1(96.636,-168.17) 1(96.647,-168.193) 1(96.647,-168.193) 1(96.659,-164.08) 1(96.659,-164.08) 1(96.681,-168.205) 1(96.681,-168.205) 1(96.692,-168.227) 1(96.692,-168.227) 1(96.727,-168.238) 1(96.727,-168.238) 1(96.738,-168.262) 1(96.738,-168.262) 1(96.772,-168.272) 1(96.772,-168.272) 1(96.784,-164.058) 1(96.784,-164.058) 1(96.817,-168.318) 1(96.817,-168.318) 1(96.841,-167.75) 1(96.841,-167.75) 1(96.841,-164.693) 1(96.841,-164.693) 1(96.851,-168.329) 1(96.851,-168.329) 1(96.863,-167.75) 1(96.863,-167.75) 1(96.863,-164.023) 1(96.863,-164.023) 1(96.874,-168.364) 1(96.874,-168.364) 1(96.908,-168.375) 1(96.908,-168.375) 1(96.92,-168.397) 1(96.92,-168.397) 1(96.943,-164.012) 1(96.943,-164.012) 1(96.954,-168.409) 1(96.954,-168.409) 1(96.965,-168.432) 1(96.965,-168.432) 1(96.965,-164.637) 1(96.965,-164.637) 1(96.999,-168.443) 1(96.999,-168.443) 1(96.999,-167.898) 1(96.999,-167.898) 1(97.011,-168.466) 1(97.011,-168.466) 1(97.022,-167.898) 1(97.022,-167.898) 1(97.022,-163.978) 1(97.022,-163.978) 1(97.045,-168.477) 1(97.045,-168.477) 1(97.056,-168.499) 1(97.056,-168.499) 1(97.09,-168.511) 1(97.09,-168.511) 1(97.09,-167.977) 1(97.09,-167.977) 1(97.09,-164.603) 1(97.09,-164.603) 1(97.101,-168.534) 1(97.101,-168.534) 1(97.101,-163.966) 1(97.101,-163.966) 1(97.113,-167.977) 1(97.113,-167.977) 1(97.135,-168.546) 1(97.135,-168.546) 1(97.147,-168.568) 1(97.147,-168.568) 1(97.181,-168.579) 1(97.181,-168.579) 1(97.181,-163.933) 1(97.181,-163.933) 1(97.192,-168.602) 1(97.192,-168.602) 1(97.215,-164.546) 1(97.215,-164.546) 1(97.227,-168.613) 1(97.227,-168.613) 1(97.238,-168.636) 1(97.238,-168.636) 1(97.26,-163.921) 1(97.26,-163.921) 1(97.272,-168.648) 1(97.272,-168.648) 1(97.283,-168.67) 1(97.283,-168.67) 1(97.317,-168.681) 1(97.317,-168.681) 1(97.34,-164.512) 1(97.34,-164.512) 1(97.34,-163.887) 1(97.34,-163.887) 1(97.362,-168.727) 1(97.362,-168.727) 1(97.374,-168.25) 1(97.374,-168.25) 1(97.397,-168.738) 1(97.397,-168.738) 1(97.397,-168.25) 1(97.397,-168.25) 1(97.397,-164.478) 1(97.397,-164.478) 1(97.409,-168.761) 1(97.409,-168.761) 1(97.419,-163.876) 1(97.419,-163.876) 1(97.442,-168.773) 1(97.442,-168.773) 1(97.454,-168.795) 1(97.454,-168.795) 1(97.454,-164.466) 1(97.454,-164.466) 1(97.476,-168.341) 1(97.476,-168.341) 1(97.488,-168.807) 1(97.488,-168.807) 1(97.499,-168.341) 1(97.499,-168.341) 1(97.499,-163.841) 1(97.499,-163.841) 1(97.511,-164.432) 1(97.511,-164.432) 1(97.533,-168.852) 1(97.533,-168.852) 1(97.567,-168.863) 1(97.567,-168.863) 1(97.567,-164.421) 1(97.567,-164.421) 1(97.579,-168.886) 1(97.579,-168.886) 1(97.579,-163.831) 1(97.579,-163.831) 1(97.601,-168.454) 1(97.601,-168.454) 1(97.613,-168.897) 1(97.613,-168.897) 1(97.624,-168.92) 1(97.624,-168.92) 1(97.624,-168.454) 1(97.624,-168.454) 1(97.624,-164.387) 1(97.624,-164.387) 1(97.658,-168.932) 1(97.658,-168.932) 1(97.658,-163.796) 1(97.658,-163.796) 1(97.681,-164.376) 1(97.681,-164.376) 1(97.703,-168.977) 1(97.703,-168.977) 1(97.738,-168.988) 1(97.738,-168.988) 1(97.738,-164.342) 1(97.738,-164.342) 1(97.75,-169.011) 1(97.75,-169.011) 1(97.783,-169.022) 1(97.783,-169.022) 1(97.783,-163.774) 1(97.783,-163.774) 1(97.795,-164.33) 1(97.795,-164.33) 1(97.817,-168.659) 1(97.817,-168.659) 1(97.828,-169.067) 1(97.828,-169.067) 1(97.84,-168.659) 1(97.84,-168.659) 1(97.852,-164.296) 1(97.852,-164.296) 1(97.863,-169.079) 1(97.863,-169.079) 1(97.863,-163.739) 1(97.863,-163.739) 1(97.885,-169.114) 1(97.885,-169.114) 1(97.908,-164.285) 1(97.908,-164.285) 1(97.92,-169.124) 1(97.92,-169.124) 1(97.93,-169.147) 1(97.93,-169.147) 1(97.942,-163.728) 1(97.942,-163.728) 1(97.965,-169.159) 1(97.965,-169.159) 1(97.965,-164.25) 1(97.965,-164.25) 1(97.987,-169.193) 1(97.987,-169.193) 1(97.999,-168.83) 1(97.999,-168.83) 1(98.022,-169.204) 1(98.022,-169.204) 1(98.022,-168.83) 1(98.022,-168.83) 1(98.022,-164.239) 1(98.022,-164.239) 1(98.022,-163.694) 1(98.022,-163.694) 1(98.033,-169.227) 1(98.033,-169.227) 1(98.067,-169.238) 1(98.067,-169.238) 1(98.079,-169.261) 1(98.079,-169.261) 1(98.09,-168.909) 1(98.09,-168.909) 1(98.101,-163.682) 1(98.101,-163.682) 1(98.113,-169.273) 1(98.113,-169.273) 1(98.113,-168.909) 1(98.113,-168.909) 1(98.113,-164.194) 1(98.113,-164.194) 1(98.124,-169.295) 1(98.124,-169.295) 1(98.158,-169.306) 1(98.158,-169.306) 1(98.169,-164.182) 1(98.169,-164.182) 1(98.204,-169.352) 1(98.204,-169.352) 1(98.226,-164.148) 1(98.226,-164.148) 1(98.226,-163.637) 1(98.226,-163.637) 1(98.238,-169.363) 1(98.238,-169.363) 1(98.283,-169.408) 1(98.283,-169.408) 1(98.283,-164.137) 1(98.283,-164.137) 1(98.306,-163.626) 1(98.306,-163.626) 1(98.318,-169.42) 1(98.318,-169.42) 1(98.328,-169.443) 1(98.328,-169.443) 1(98.34,-164.103) 1(98.34,-164.103) 1(98.351,-169.159) 1(98.351,-169.159) 1(98.363,-169.454) 1(98.363,-169.454) 1(98.374,-169.159) 1(98.374,-169.159) 1(98.397,-164.092) 1(98.397,-164.092) 1(98.408,-169.5) 1(98.408,-169.5) 1(98.42,-164.068) 1(98.42,-164.068) 1(98.442,-169.238) 1(98.442,-169.238) 1(98.465,-169.238) 1(98.465,-169.238) 1(98.476,-164.058) 1(98.476,-164.058) 1(98.488,-169.533) 1(98.488,-169.533) 1(98.522,-169.568) 1(98.522,-169.568) 1(98.533,-164.023) 1(98.533,-164.023) 1(98.555,-169.579) 1(98.555,-169.579) 1(98.567,-169.352) 1(98.567,-169.352) 1(98.578,-169.613) 1(98.578,-169.613) 1(98.578,-163.557) 1(98.578,-163.557) 1(98.59,-169.352) 1(98.59,-169.352) 1(98.59,-164.012) 1(98.59,-164.012) 1(98.658,-169.659) 1(98.658,-169.659) 1(98.681,-169.454) 1(98.681,-169.454) 1(98.681,-163.966) 1(98.681,-163.966) 1(98.681,-163.512) 1(98.681,-163.512) 1(98.704,-169.568) 1(98.704,-169.568) 1(98.704,-169.454) 1(98.704,-169.454) 1(98.715,-169.568) 1(98.715,-169.568) 1(98.715,-169.5) 1(98.715,-169.5) 1(98.715,-169.488) 1(98.715,-169.488) 1(98.726,-169.647) 1(98.726,-169.647) 1(98.726,-169.511) 1(98.726,-169.511) 1(98.737,-169.647) 1(98.737,-169.647) 1(98.737,-169.488) 1(98.737,-169.488) 1(98.737,-163.955) 1(98.737,-163.955) 1(98.749,-169.682) 1(98.749,-169.682) 1(98.794,-163.921) 1(98.794,-163.921) 1(98.851,-163.91) 1(98.851,-163.91) 1(98.874,-163.887) 1(98.874,-163.887) 1(98.896,-163.478) 1(98.896,-163.478) 1(98.931,-163.876) 1(98.931,-163.876) 1(98.931,-163.455) 1(98.931,-163.455) 1(99.01,-163.831) 1(99.01,-163.831) 1(99.01,-163.444) 1(99.01,-163.444) 1(99.067,-163.819) 1(99.067,-163.819) 1(99.113,-163.784) 1(99.113,-163.784) 1(99.17,-163.774) 1(99.17,-163.774) 1(99.192,-163.751) 1(99.192,-163.751) 1(99.249,-163.739) 1(99.249,-163.739) 1(99.305,-163.705) 1(99.305,-163.705) 1(99.362,-163.694) 1(99.362,-163.694) 1(99.431,-163.341) 1(99.431,-163.341) 1(99.544,-163.592) 1(99.544,-163.592) 1(99.601,-163.58) 1(99.601,-163.58) 1(99.624,-163.557) 1(99.624,-163.557) 1(99.681,-163.547) 1(99.681,-163.547) 1(99.748,-163.262) 1(99.748,-163.262) 1(99.771,-163.49) 1(99.771,-163.49) 1(99.851,-163.467) 1(99.851,-163.467) 1(99.93,-163.41) 1(99.93,-163.41) 1(100.032,-163.365) 1(100.032,-163.365) 1(100.032,-163.228) 1(100.032,-163.228) 1(100.101,-163.296) 1(100.101,-163.296) 1(100.112,-163.251) 1(100.112,-163.251)

## Via types
v1: diameter 0.85, hole 0.5, Top Layer to Bottom Layer, tented both sides, 18 vias

## Nets (pads, with @x,y where several pads share a name; then routed paths per layer and width w, separated by ;. In a path a pad name is that pad's centre, name@x,y a point inside that pad or via, vN(x,y) a via of type N, cw(c..) or ccw(c..) an arc to the next point about the centre after c; other vN are vias at no path point)
+5V: +5V.1 C1.2 U1.1 U3.1 U5.1 U7.1 U9.1 U11.1 U13.1 U15.1 U17.1 U19.1 U21.1 U23.1 U25.1 U27.1 U29.1 U31.1 | length 0.4
  Top Layer w0.254: -40.075,11.32 ccw(c-40.317,11.395) -40.074,11.322 ; -39.525,13.133 cw(c-39.271,13.122) -39.467,13.283 ; -28.055,-30.903 cw(c-28.121,-31.149) -27.875,-31.084 ; -24.002,34.036 cw(c-23.859,33.826) -23.999,34.038 ; 3.228,-41.527 ccw(c3.217,-41.273) 3.23,-41.527 ; 17.205,-37.92 ccw(c17.097,-37.69) 17.206,-37.919
GND: C1.1 U1.3 U3.3 U5.3 U7.3 U9.3 U11.3 U13.3 U15.3 U17.3 U19.3 U21.3 U23.3 U25.3 U27.3 U29.3 U31.3 VSS.1 | length 27.8
  Top Layer w0.254: U17.3@-45.748,-2.45 -45.694,-1.827 -45.694,-1.816 v1(-45.625,-1) ; U19.3@-43.212,15.243 -43.014,15.835 v1@-42.75,16.624 ; v1(-41.872,-18.125) -41.53,-19.176 U15.3@-41.337,-19.77 ; U21.3@-34.132,30.668 -33.658,31.075 -33.652,31.081 v1(-32.875,31.75) ; v1(-31.875,-32.875) -31.076,-33.66 U13.3@-30.632,-34.097 ; U23.3@-19.77,41.337 -19.182,41.545 v1(-18.25,41.875) ; v1(-16.75,-42.25) -16.094,-42.906 -15.808,-42.906 -15.778,-42.877 U11.3@-15.243,-43.212 ; U25.3@-2.45,45.825 -1.827,45.849 -1.822,45.849 v1(-1.125,45.875) ; v1(1,-45.75) 1.013,-45.737 1.827,-45.737 U9.3@2.45,-45.725 ; U27.3@15.243,43.212 15.816,42.968 v1(16.625,42.625) ; v1(18,-42) 19.067,-41.57 U7.3@19.645,-41.337 ; U29.3@30.625,34.09 31.073,33.657 31.074,33.655 v1(31.75,33) ; v1(33.125,-31.732) 33.658,-31.09 33.666,-31.082 U5.3@34.065,-30.6 ; U31.3@41.337,19.77 41.581,19.197 41.581,18.572 41.875,18.278 v1(41.875,18.125) ; C1.1@41.875,-5.45 42.073,-5.488 42.087,-5.488 43.353,-5.714 43.375,-5.714 VSS.1@44.25,-5.875 ; v1(42.625,-16.375) 42.924,-15.798 U3.3@43.212,-15.243 ; v1(44.375,3.5) 45.267,2.782 45.357,2.782 U1.3@45.68,2.45
  other v1: -42.75,16.625
NetDIN_1: DIN.1 U1.4 | length 13.9
  Top Layer w0.254: U1.4@42.38,2.45 42.38,-0.783 44.9,-3.303 44.9,-4.163 45.83,-5.093 45.83,-6.542 45.417,-6.955 44.66,-6.955 44.583,-7.032 43.656,-8.025 43.656,-8.125 DIN.1@43.212,-8.5
NetU1_2: U1.2 U3.4 | length 16.9
  Top Layer w0.254: U3.4@40.163,-13.98 40.581,-13.816 40.722,-13.816 41.34,-13.635 41.375,-13.625 v1(41.5,-13.625) ; v1(45.68,-3.875) U1.2@45.68,-2.45
  Bottom Layer w0.254: v1(41.5,-13.625) 41.622,-13.625 43.33,-11.917 43.33,-10.583 42.622,-9.875 42.34,-9.875 41.632,-9.167 41.632,-6.246 44.003,-3.875 v1(45.68,-3.875)
NetU3_2: U3.2 U5.4 | length 12.8
  Top Layer w0.254: U5.4@31.732,-28.267 32.199,-27.854 32.205,-27.848 U3.2@40.817,-20.23 ; U3.2@40.817,-20.229 U3.2@41.337,-19.77